# Altium PCB Layout_Dendro.PcbDoc (part 2 of 2)
Units mm, origin at the board's own origin, x right, y up, seen from the top; angles counter-clockwise.
Board outline 80 x 80 mm, 4 copper layers (L1 - TOP (Sig), L2 (GND), L3 (GND), L4 - BOT (Sig)), stack 0.603 mm thick; 132 components, 78 nets, 366 pads, 100 vias.
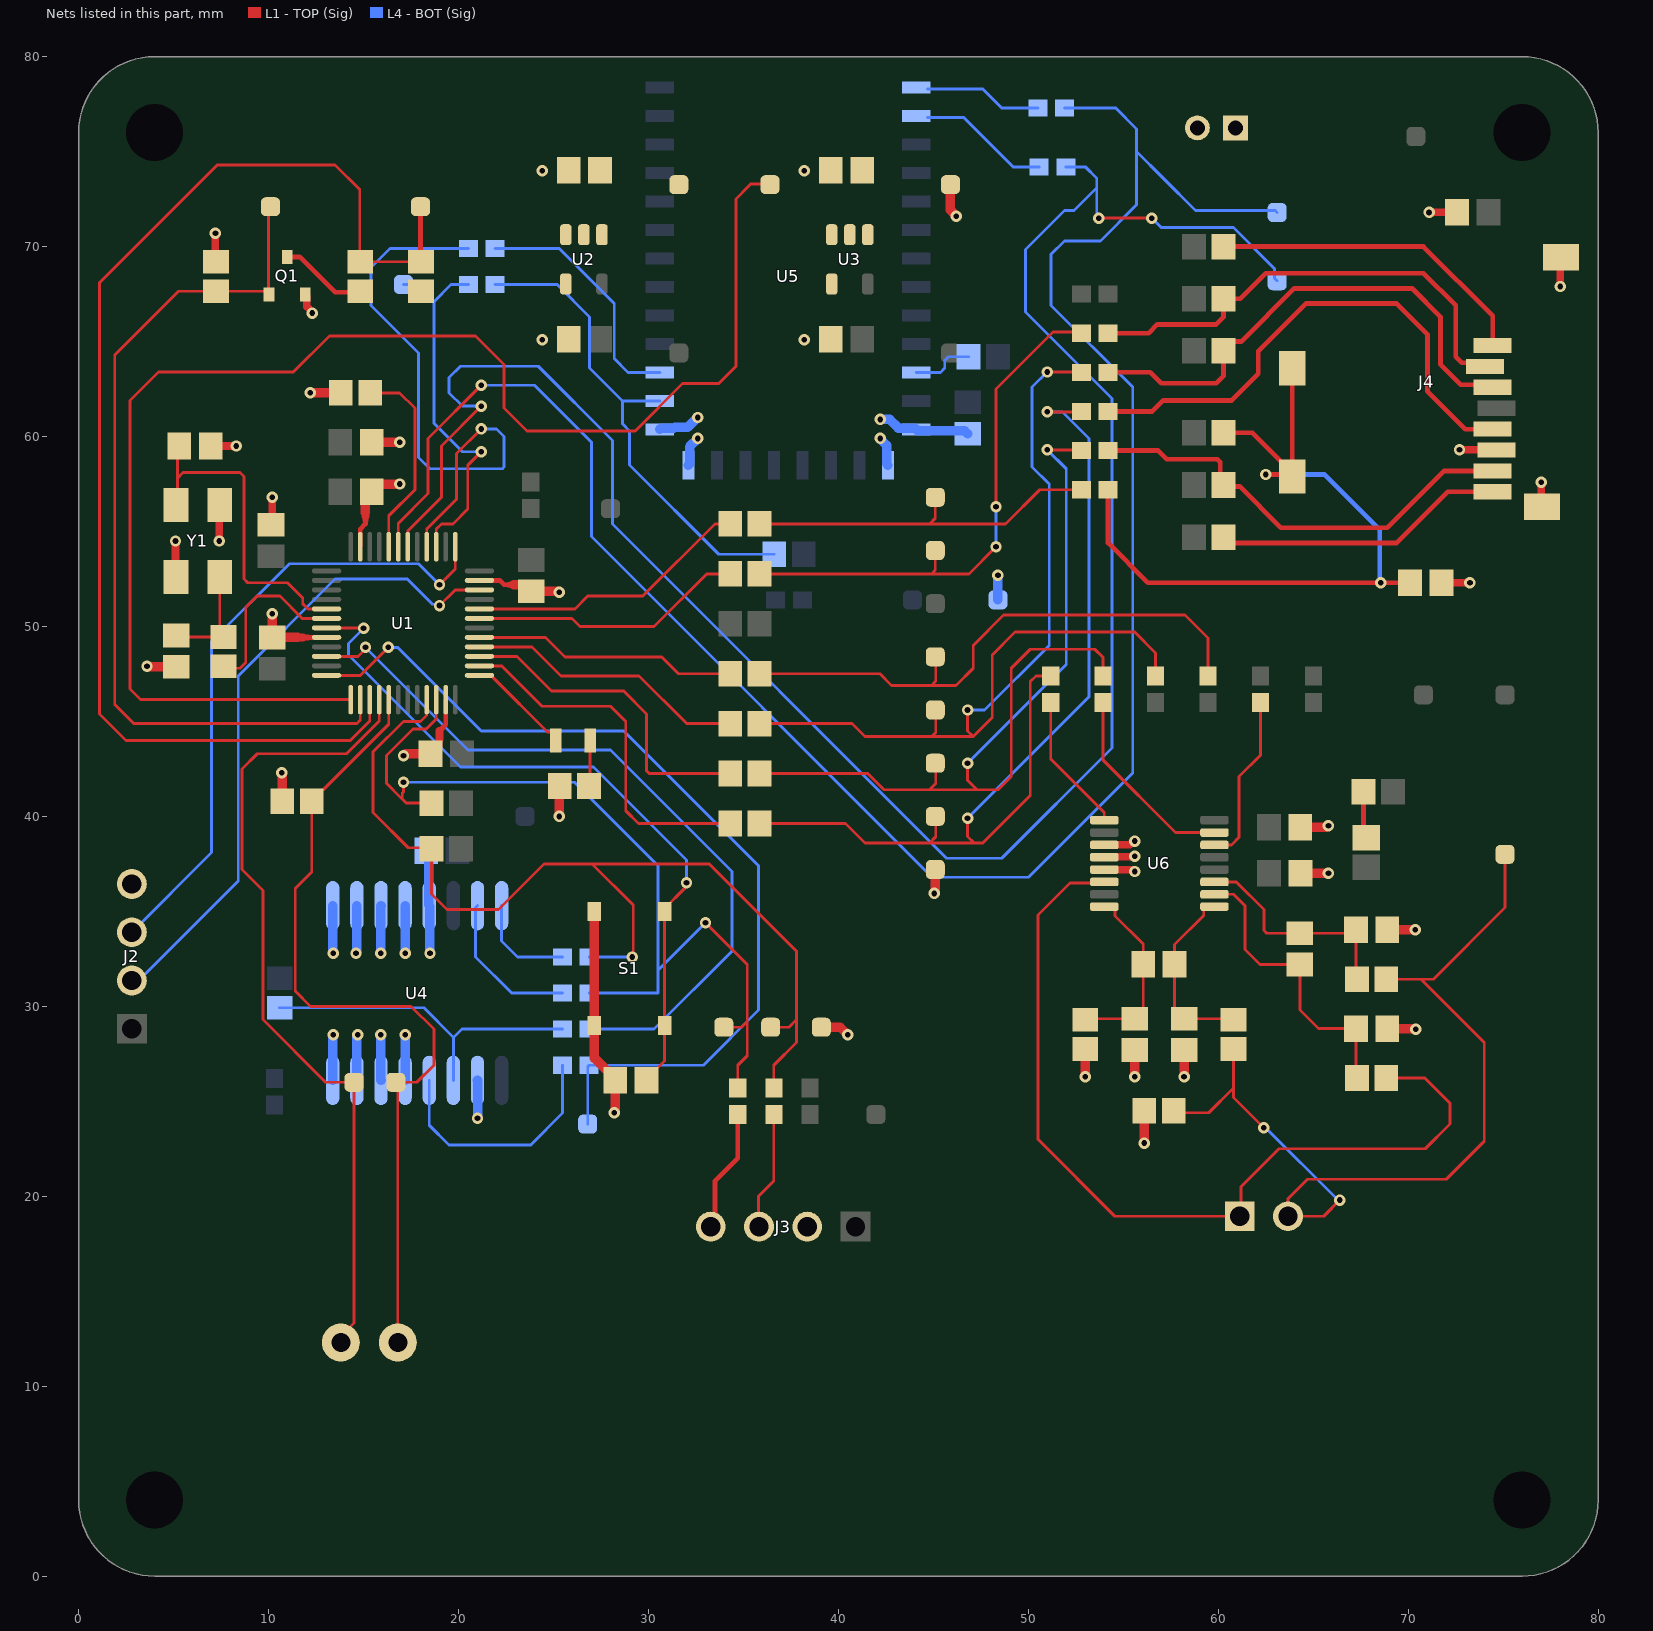
[diagram p4: the nets of this part, all layers, seen from the top]

## Via types
v1: diameter 0.6, hole 0.3, L1 - TOP (Sig) to L4 - BOT (Sig), tented top, 100 vias

## Nets (pads, with @x,y where several pads share a name; then routed paths per layer and width w, separated by ;. In a path a pad name is that pad's centre, name@x,y a point inside that pad or via, vN(x,y) a via of type N, cw(c..) or ccw(c..) an arc to the next point about the centre after c; other vN are vias at no path point) (continued)
ADS_DOUT: JP21.2 U6.15 | length 10.5
  L1 - TOP (Sig) w0.15: JP21.2@53.94,46 53.94,42.96 57.75,39.15 U6.15@59.8,39.15
ADS_DRDY: JP23.1 U6.14 | length 9
  L1 - TOP (Sig) w0.15: U6.14@59.8,38.5 60.7,38.5 61.1,38.9 61.1,42.1 62.22,43.22 JP23.1@62.22,46
ADS_SCLK: JP24.2 U6.1 | length 7.4
  L1 - TOP (Sig) w0.15: JP24.2@51.18,46 51.18,43.02 54,40.2 U6.1@54,39.8
AIN_N: C21.2 C25.1 R31.2 U6.11 | length 11.9
  L1 - TOP (Sig) w0.15: U6.11@59.8,36.55 60.95,36.55 62.4,35.1 62.4,34 62.55,33.85 C21.2@64.3,33.85 67.075,33.85 C25.1@67.25,34.025 67.25,31.475 R31.2@67.3,31.425
AIN_P: C21.1 C24.1 R27.2 U6.10 | length 15.8
  L1 - TOP (Sig) w0.15: U6.10@59.8,35.9 60.8,35.9 61.4,35.3 61.4,33 62.2,32.2 C21.1@64.3,32.2 64.3,29.8 65.275,28.825 C24.1@67.25,28.825 67.25,26.275 R27.2@67.3,26.225
BAT_MEAS: R1.2 R2.1 TP4.1 U1.15 | length 65.8
  L1 - TOP (Sig) w0.15: U1.15@15.327,46.15 U1.15@15.327,46.15 15.326,45.026 14.3,44 2.5,44 1.1,45.4 1.1,68.1 7.3,74.3 13.5,74.3 14.8,73 14.8,69.227 R2.1@14.827,69.2 R1.2@18.027,69.2
  L1 - TOP (Sig) w0.25: TP4.1@18,72.1 18,69.227 R1.2@18.027,69.2
BLE_EN: JP12.2 TP17.1 U1.39 | length 20
  L1 - TOP (Sig) w0.15: U1.39@18.827,54.2 18.827,55.127 19.1,55.4 19.7,55.4 20.488,56.188 20.488,58.488 v1(21.2,59.2)
  L4 - BOT (Sig) w0.15: TP17.1@17.1,68 17.8,68 18.7,67.1 ; JP12.2@20.525,68 19.6,68 18.7,67.1 ; v1(21.2,59.2) 20.2,59.2 18.7,60.7 18.7,67.1
BLE_STATE: JP14.2 U1.40 | length 31.7
  L1 - TOP (Sig) w0.15: U1.40@18.327,54.2 18.327,55.127 19.9,56.7 19.9,59.1 v1(21.2,60.4)
  L4 - BOT (Sig) w0.15: JP14.2@20.525,69.9 16.4,69.9 15.4,68.9 15.4,66.9 17.9,64.4 17.9,58.9 18.5,58.3 22.312,58.3 22.4,58.388 22.4,60 22,60.4 v1(21.2,60.4)
CARD_DET: JP16.2 R18.2 TP27.1 | length 19.2
  L1 - TOP (Sig) w0.15: R18.2@35.85,55.4 44.8,55.4 ; TP27.1@45.1,56.8 45.1,55.7 44.8,55.4 ; JP16.2@52.8,57.2 50.6,57.2 48.8,55.4 44.8,55.4
CARD_DET_MCU: R18.1 U1.32 | length 15.7
  L1 - TOP (Sig) w0.15: U1.32@21.102,50.925 26.125,50.925 26.8,51.6 29.7,51.6 33.5,55.4 R18.1@34.3,55.4 R18.1@33.838,54.938
DEBUG_LED_A: D1.1 U1.25 | length 5.6
  L1 - TOP (Sig) w0.15: U1.25@21.102,47.425 21.725,47.425 21.802,47.348 21.802,47.325 24.69,44.437 24.902,44.437 25.127,44.212 D1.1@25.127,44
DEBUG_LED_K: D1.2 R32.1 | length 2.4
  L1 - TOP (Sig) w0.15: R32.1@26.875,41.6 26.927,41.652 D1.2@26.927,44
DL_LIM: C13.1 R4.1 Y1.3 | length 5.8
  L1 - TOP (Sig) w0.15: C13.1@5.127,49.525 5.202,49.45 R4.1@7.627,49.45 7.427,49.65 Y1.3@7.427,52.6
DS_INT: JP6.1 R8.2 U4.3 | length 18
  L4 - BOT (Sig) w0.15: R8.2@10.578,29.925 18.175,29.925 19.738,28.362 ; U4.3@19.728,26.1 19.728,27.828 19.738,27.838 19.738,28.362 ; JP6.1@25.478,28.8 20.176,28.8 19.738,28.362
DS_RST: JP9.1 U4.4 | length 13
  L4 - BOT (Sig) w0.15: U4.4@18.458,26.1 18.458,23.742 19.5,22.7 23.8,22.7 25.478,24.378 JP9.1@25.478,26.9
DS_SCL: JP5.2 U4.16 | length 5.4
  L4 - BOT (Sig) w0.15: U4.16@22.268,35.3 22.268,33.432 23.1,32.6 JP5.2@25.478,32.6
DS_SDA: JP8.2 U4.15 | length 8.1
  L4 - BOT (Sig) w0.15: U4.15@20.998,35.3 20.9,35.202 20.9,32.6 22.8,30.7 JP8.2@25.478,30.7
EN_ADC_REG: TP7.1 U1.13 U3.3 | length 76.1
  L1 - TOP (Sig) w0.15: U1.13@14.327,46.15 3.25,46.15 2.7,46.7 2.7,61.9 4.2,63.4 11.3,63.4 13.2,65.3 20.9,65.3 22.4,63.8 22.4,61.5 23.6,60.3 29.3,60.3 31.8,62.8 33.7,62.8 34.6,63.7 34.6,72.5 35.3,73.2 35.3,73.212 35.388,73.3 36.36,73.3 TP7.1@36.4,73.26
EN_BAT_MEAS: Q1.1 R3.1 TP5.1 U1.14 | length 47.1
  L1 - TOP (Sig) w0.15: Q1.1@10.022,67.475 Q1.1@10,67.497 ; TP5.1@10.1,72.1 10,72 Q1.1@10,67.497 ; U1.14@14.827,46.15 14.827,45.076 14.651,44.9 2.9,44.9 1.9,45.9 1.9,64.3 5.25,67.65 R3.1@7.227,67.65 9.847,67.65 Q1.1@10,67.497
EN_LIGHT_MEAS: R11.1 TP20.1 U1.16 | length 43.2
  L1 - TOP (Sig) w0.15: R11.1@13.8,12.3 13.8,12.632 14.5,13.332 TP20.1@14.5,26 13,26 9.7,29.3 9.7,36.1 8.6,37.2 8.6,42.5 9.4,43.3 14.1,43.3 15.827,45.027 U1.16@15.827,46.15
FB_AVDD: FB1.1 R26.2 | length 2.5
  L1 - TOP (Sig) w0.25: R26.2@67.65,41.3 67.65,39.025 FB1.1@67.798,38.877
GND: C1.2 C2.2 C3.2 C4.2 C5.2 C6.2 C7.2 C8.2 C9.2 C10.2 C11.2 C12.2 C13.2 C14.2 C15.2 C16.2 C17.2 C18.2 C19.2 C22.2 C23.2 C24.2 C25.2 J1.2 J2.4 J3.2 J4.6 J4.11 J4.12 Q1.2 R3.2 R5.2 R12.2 R29.2 R30.2 R32.2 S1.3 S1.4 TP3.1 TP12.1 TP19.1 TP29.1 U1.8 U1.23 U1.35 U1.47 U2.2 U2.4 U3.2 U3.4 U4.2 U4.5 U4.6 U4.7 U4.8 U4.9 U4.10 U4.11 U4.12 U4.13 U5.13 U5.14 U5.21 U5.22 U6.3 U6.4 U6.5 Y1.2 Y1.4 | length 114.3
  L1 - TOP (Sig) w0.25: 12.069,49.422 12.072,49.425 U1.8@13.052,49.425 ; U1.47@14.827,54.2 14.827,55.127 15.1,55.4 15.1,55.6 ; 19.2,44.7 19.327,44.827 U1.23@19.327,46.15 ; U1.35@21.102,52.425 22.175,52.425 22.4,52.2 22.6,52.2
  L1 - TOP (Sig) w0.3: 11.812,49.419 11.815,49.422 12.069,49.422 ; 15.1,55.6 15.1,55.8 ; 19,44.5 19.2,44.7 ; 22.6,52.2 22.8,52.2
  L1 - TOP (Sig) w0.4: v1(5.1,54.5) 5.1,52.627 Y1.2@5.127,52.6 ; C12.2@6.952,59.5 v1(8.3,59.5) ; v1(7.2,70.7) 7.2,69.227 R3.2@7.227,69.2 ; v1(7.4,54.5) 7.4,56.373 Y1.4@7.427,56.4 ; C8.2@10.127,55.35 10.2,55.423 v1(10.2,56.8) ; 11.535,49.421 11.537,49.419 11.812,49.419 ; Q1.2@11.927,67.475 12.006,67.396 12.006,66.848 12.3,66.554 v1(12.3,66.5) ; 15.1,55.8 15.1,56 ; C11.2@18.8,43.573 18.952,43.725 18.952,43.986 19,44.034 19,44.5 ; 22.8,52.2 22.9,52.2 ; U6.5@54,37.2 55.446,37.2 55.546,37.1 v1(55.6,37.1) ; U6.4@54,37.85 54.025,37.875 55.575,37.875 v1(55.6,37.9) ; U6.3@54,38.5 55.346,38.5 55.546,38.7 v1(55.6,38.7) ; v1(71.1,71.8) C16.2@72.575,71.8 ; C17.2@71.75,52.3 v1(73.25,52.3) ; v1(72.7,59.3) 72.705,59.295 74.645,59.295 J4.6@74.65,59.29 ; v1(77,57.6) 77,56.35 J4.11@77.05,56.3 ; v1(78,67.9) 78,69.4 J4.12@78.05,69.45
  L1 - TOP (Sig) w0.5: v1(3.6,47.9) 3.612,47.888 5.115,47.888 C13.2@5.127,47.875 ; v1(10.2,50.675) C6.2@10.2,49.425 10.204,49.421 11.535,49.421 ; v1(10.7,42.3) 10.713,42.287 10.713,40.812 R12.2@10.725,40.8 ; v1(12.2,62.3) R5.2@13.8,62.3 ; 15.1,56 15.1,56.775 C9.2@15.425,57.1 15.425,57.106 15.8,57.481 16.881,57.481 v1(16.9,57.5) ; C7.2@15.425,59.7 v1(16.9,59.7) ; v1(17.1,43.2) 17.127,43.2 17.227,43.3 C11.2@18.527,43.3 C11.2@18.8,43.573 ; 22.9,52.2 23.477,52.2 C10.2@23.827,51.85 25.223,51.85 25.273,51.8 v1(25.3,51.8) ; v1(25.3,40) 25.313,40.013 25.313,41.588 R32.2@25.325,41.6 ; S1.3@27.15,35 S1.4@27.15,29 27.15,27.275 28.25,26.175 28.25,24.477 28.2,24.427 v1(28.2,24.4) ; TP12.1@39.1,28.9 40.1,28.9 v1(40.5,28.5) ; C4.2@39.7,65.202 C4.2@39.775,65.127 ; v1(45.044,35.944) 45.044,35.971 45.1,36.027 TP29.1@45.1,37.2 ; TP3.1@45.9,73.26 45.9,71.927 46.2,71.627 v1(46.2,71.6) ; v1(53,26.3) R30.2@53,27.75 ; v1(55.6,26.3) C22.2@55.6,27.7 ; v1(56.1,22.8) R29.2@56.1,24.5 ; v1(58.2,26.3) C23.2@58.2,27.7 ; C18.2@64.323,39.425 65.698,39.425 65.773,39.5 v1(65.8,39.5) ; C19.2@64.325,37.001 v1@65.8,37 ; C24.2@68.9,28.825 68.912,28.812 70.388,28.812 v1(70.4,28.8) ; C25.2@68.9,34.025 68.903,34.028 70.369,34.028 v1(70.371,34.031)
  L4 - BOT (Sig) w0.5: U4.8@13.378,26.1 13.389,26.111 13.389,28.489 v1(13.4,28.5) ; U4.9@13.378,35.3 13.389,35.289 13.389,32.811 v1(13.4,32.8) ; v1(14.6,32.8) 14.6,32.827 14.648,32.875 U4.10@14.648,35.3 ; U4.7@14.648,26.1 14.648,28.421 14.7,28.473 v1(14.7,28.5) ; v1(15.9,28.5) 15.909,28.491 15.909,26.109 U4.6@15.918,26.1 ; v1(15.9,32.8) 15.909,32.809 15.909,35.291 U4.11@15.918,35.3 ; U4.5@17.188,26.1 17.194,26.106 17.194,28.494 v1(17.2,28.5) ; U4.12@17.188,35.3 17.194,35.294 17.194,32.806 v1(17.2,32.8) ; C14.2@18.3,38.2 18.42,38.08 18.42,35.338 U4.13@18.458,35.3 18.481,35.277 18.481,32.819 v1(18.5,32.8) ; v1@20.999,24.101 U4.2@20.999,26.099 ; U5.22@30.6,60.375 30.668,60.443 31.335,60.443 31.393,60.5 32.073,60.5 32.573,61 v1(32.6,61) ; U5.21@32.1,58.5 32.167,58.568 32.167,59.468 v1(32.6,59.9) ; v1(42.2,59.9) 42.2,59.873 42.533,59.54 42.533,58.568 U5.14@42.6,58.5 ; v1@42.227,60.9 42.7,60.9 43.158,60.443 44.033,60.443 44.168,60.307 46.643,60.307 C15.2@46.8,60.15 ; TP19.1@48.4,51.4 v1(48.4,52.7)
  other v1: 21,24.1 65.8,37 42.2,60.9 24.4,65.1 38.2,65.1 24.4,74 38.2,74
HM10_EN: JP12.1 R10.2 U5.23 | length 25.9
  L4 - BOT (Sig) w0.15: JP12.1@21.925,68 25.2,68 26.9,66.3 26.9,63.6 28.625,61.875 ; U5.23@30.6,61.875 28.625,61.875 ; R10.2@36.625,53.8 33.7,53.8 29,58.5 29,60.3 28.625,60.675 28.625,61.875
HM10_RST: R9.2 U5.11 | length 3.3
  L4 - BOT (Sig) w0.15: U5.11@44.1,63.375 45.375,63.375 45.6,63.6 45.6,64 45.8,64.2 R9.2@46.85,64.2
HM10_RX: JP13.2 U5.2 | length 6.9
  L4 - BOT (Sig) w0.15: U5.2@44.7,76.8 46.6,76.8 49.2,74.2 JP13.2@50.573,74.2
HM10_STATE: JP14.1 U5.24 | length 13.1
  L4 - BOT (Sig) w0.15: JP14.1@21.925,69.9 25.3,69.9 28.2,67 28.2,64.1 28.925,63.375 U5.24@30.6,63.375
HM10_TX: JP11.2 U5.1 | length 6.2
  L4 - BOT (Sig) w0.15: U5.1@44.7,78.3 47.6,78.3 48.6,77.3 JP11.2@50.5,77.3
I2C_SCL: JP3.1 JP5.1 R6.2 TP10.1 U1.21 | length 53.8
  L1 - TOP (Sig) w0.15: U1.21@18.327,46.15 18.316,46.139 18.316,45.316 18,45 17.1,45 15.5,43.4 15.5,40.2 17.35,38.35 18.527,38.35 R6.2@18.577,38.3 18.577,35.923 19.4,35.1 22.1,35.1 24.5,37.5 27.029,37.5 ; v1(29.138,32.595) 29.2,32.657 29.2,35.329 27.029,37.5 ; TP10.1@36.5,28.967 TP10.1@36.433,28.9 37.4,28.9 37.8,29.3 ; JP3.1@36.6,25.7 36.6,26.9 37.8,28.1 37.8,29.3 ; 27.029,37.5 33.2,37.5 37.8,32.9 37.8,29.3
  L4 - BOT (Sig) w0.15: JP5.1@26.878,32.6 26.883,32.595 v1(29.138,32.595)
I2C_SDA: JP4.1 JP8.1 R7.2 TP11.1 U1.22 | length 50
  L1 - TOP (Sig) w0.15: 17.034,40.937 17.034,41.215 17.1,41.281 v1(17.1,41.8) ; R7.2@18.725,40.7 17.248,40.7 17.023,40.925 16.948,41 16.2,41.748 16.2,43.2 17.6,44.6 18.3,44.6 18.827,45.127 U1.22@18.827,46.15 ; v1(33,34.4) 35.2,32.2 35.2,29.2 ; TP11.1@33.967,28.9 34.9,28.9 35.2,29.2 ; JP4.1@34.7,25.7 34.7,26.9 35.2,27.4 35.2,29.2
  L4 - BOT (Sig) w0.15: v1(17.1,41.8) 26.1,41.8 30.5,37.4 30.5,31.9 ; JP8.1@26.878,30.7 30.5,30.7 30.5,31.9 ; v1(33,34.4) 30.5,31.9
LIGHT_MEAS: R11.2 R12.1 TP21.1 U1.17 | length 43.6
  L1 - TOP (Sig) w0.15: U1.17@16.327,46.15 16.327,44.852 12.875,41.4 12.825,41.4 12.275,40.85 12.275,37.075 11.4,36.2 11.4,30.8 12.2,30 17.5,30 18.7,28.8 18.7,26.9 17.8,26 TP21.1@16.7,26 16.8,25.9 R11.2@16.8,12.3
MCU_BOOT: R5.1 U1.44 | length 10.6
  L1 - TOP (Sig) w0.15: R5.1@15.35,62.3 16.9,62.3 17.7,61.5 17.7,57.2 16.327,55.827 U1.44@16.327,54.2
MCU_OSC_IN: C12.1 U1.5 Y1.1 | length 17.5
  L1 - TOP (Sig) w0.15: Y1.1@5.127,56.4 5.2,56.473 5.2,57.8 ; C12.1@5.302,59.5 5.2,59.398 5.2,57.8 ; U1.5@13.052,50.925 12.075,50.925 12,51 11.8,51.2 11.8,51.5 11,52.3 8.9,52.3 8.7,52.5 8.7,57.9 8.5,58.1 5.5,58.1 5.2,57.8
MCU_OSC_OUT: R4.2 U1.6 | length 9.2
  L1 - TOP (Sig) w0.15: R4.2@7.627,47.9 7.727,47.8 8.5,47.8 8.8,48.1 8.8,51 9.4,51.6 10.6,51.6 11.775,50.425 U1.6@13.052,50.425
MCU_RESET: C5.1 S1.1 S1.2 U1.7 | length 38.4
  L1 - TOP (Sig) w0.15: U1.7@13.052,49.925 13.065,49.912 14.988,49.912 v1(15,49.9) ; C5.1@29.9,26.1 29.9,26.175 30.85,27.125 S1.2@30.85,29 S1.1@30.85,35 30.85,35.15 31.914,36.214 31.914,36.414 v1(32,36.5)
  L4 - BOT (Sig) w0.15: v1(15,49.9) 14.2,49.1 14.2,48.5 20.1,42.6 27.1,42.6 32,37.7 v1(32,36.5)
REF_N: C20.2 C22.1 R30.1 U6.8 | length 9.8
  L1 - TOP (Sig) w0.15: R30.1@53,29.3 53.05,29.35 C22.1@55.6,29.35 56.05,29.8 C20.2@56.05,32.225 56.05,33.277 54.563,34.765 54.563,35.103 54.415,35.25 U6.8@54,35.25
REF_P: C20.1 C23.1 R28.1 U6.9 | length 9.8
  L1 - TOP (Sig) w0.15: U6.9@59.8,35.25 59.385,35.25 59.237,35.103 59.237,34.79 57.7,33.252 C20.1@57.7,32.225 57.7,29.85 C23.1@58.2,29.35 60.75,29.35 R28.1@60.8,29.3
RTC_INT: JP6.2 U1.10 | length 39.9
  L1 - TOP (Sig) w0.15: U1.10@13.052,48.425 14.703,48.425 15.1,48.822 v1(15.1,48.9)
  L4 - BOT (Sig) w0.15: v1(15.1,48.9) 20.5,43.5 28,43.5 34.4,37.1 34.4,32.9 30.3,28.8 JP6.2@26.878,28.8
RTC_RST: JP9.2 TP14.1 U1.12 | length 49
  L1 - TOP (Sig) w0.15: U1.12@13.052,47.425 14.825,47.425 v1(16.3,48.9)
  L4 - BOT (Sig) w0.15: v1(16.3,48.9) 16.8,48.9 19.3,46.4 21.2,44.5 28.7,44.5 35.8,37.4 35.8,29.8 32.9,26.9 JP9.2@26.878,26.9 26.8,26.822 TP14.1@26.8,23.8
RX_MCU: JP11.1 TP16.1 U1.43 | length 112.2
  L1 - TOP (Sig) w0.15: U1.43@16.827,54.2 16.827,55.427 18.4,57 18.4,59.9 v1(21.2,62.7)
  L4 - BOT (Sig) w0.15: v1(21.2,62.7) 24,62.7 27,59.7 27,54.73 44.93,36.8 50.012,36.8 55.5,42.288 55.5,62.6 51.2,66.9 51.2,69.6 51.9,70.3 53.8,70.3 55.7,72.2 55.7,75 ; JP11.1@51.9,77.3 54.6,77.3 55.7,76.2 55.7,75 ; TP16.1@63.1,71.8 63,71.9 58.8,71.9 57.1,73.6 55.7,75
SD_CD: C17.1 J4.9 J4.10 JP16.1 R25.2 | length 41
  L1 - TOP (Sig) w0.25: JP16.1@54.2,57.2 54.2,54.4 56.3,52.3 v1(68.55,52.3) C17.1@70.1,52.3 ; R25.2@60.25,60.2 61.8,60.2 J4.9@63.9,58.1 ; v1(62.5,58) 63.8,58 J4.9@63.9,58.1 ; J4.10@63.9,63.6 J4.9@63.9,58.1
  L4 - BOT (Sig) w0.25: v1(62.5,58) 65.6,58 68.5,55.1 v1@68.5,52.3
SD_CLK: J4.5 JP19.2 | length 27.8
  L1 - TOP (Sig) w0.25: JP19.2@54.2,61.32 56.52,61.32 57.1,61.9 60.7,61.9 62.1,63.3 62.1,64.5 64.6,67 69.4,67 71.01,65.39 71.01,62.39 73.01,60.39 J4.5@74.45,60.39
SD_CMD: J4.3 JP18.2 R21.2 | length 27
  L1 - TOP (Sig) w0.25: JP18.2@54.2,63.38 56.42,63.38 57,62.8 59.9,62.8 60.275,63.175 R21.2@60.275,64.52 ; R21.2@60.25,64.57 60.68,65 61.2,65 64,67.8 70.2,67.8 71.7,66.3 71.7,63.8 72.77,62.73 74.31,62.73 J4.3@74.45,62.59
SD_DAT0: J4.7 JP17.2 R22.2 | length 23.7
  L1 - TOP (Sig) w0.25: JP17.2@54.2,59.26 56.84,59.26 57.3,58.8 59.954,58.8 60.1,58.654 60.1,57.81 60.25,57.66 60.539,57.371 61.129,57.371 63.3,55.2 68.9,55.2 71.89,58.19 J4.7@74.45,58.19
SD_DAT1: J4.8 R24.2 | length 15.4
  L1 - TOP (Sig) w0.25: R24.2@60.275,54.7 60.575,54.4 69.4,54.4 72.09,57.09 J4.8@74.45,57.09
SD_DAT2: J4.1 R23.2 | length 17.2
  L1 - TOP (Sig) w0.25: R23.2@60.275,70 70.8,70 74.45,66.35 J4.1@74.45,64.79
SD_DAT3: J4.2 JP20.2 R20.2 | length 25.4
  L1 - TOP (Sig) w0.25: JP20.2@54.2,65.44 56.34,65.44 56.8,65.9 59.9,65.9 60.275,66.275 R20.2@60.275,67.26 61.16,67.26 62.5,68.6 70.8,68.6 72.5,66.9 72.5,64.2 72.821,63.879 73.861,63.879 J4.2@74.05,63.69
SHT_SCL: J3.3 JP3.2 | length 6.2
  L1 - TOP (Sig) w0.15: J3.3@35.82,18.4 35.8,18.42 35.8,20 36.6,20.8 JP3.2@36.6,24.3
SHT_SDA: J3.4 JP4.2 | length 6.5
  L1 - TOP (Sig) w0.25: J3.4@33.28,18.4 33.5,18.62 33.5,20.8 34.7,22 JP4.2@34.7,24.3
SPI_CLK: JP19.1 JP24.1 R15.2 TP24.1 | length 53.1
  L1 - TOP (Sig) w0.15: R15.2@35.85,39.627 40.373,39.627 41.4,38.6 44.8,38.6 ; TP24.1@45.125,40 45.125,38.925 44.8,38.6 ; v1(46.8,39.9) 46.8,38.95 47.15,38.6 ; v1(51,61.3) 52.78,61.3 JP19.1@52.8,61.32 ; JP24.1@51.18,47.4 50.4,47.4 50.1,47.1 50.1,41.1 47.6,38.6 47.15,38.6 ; 44.8,38.6 47.15,38.6
  L4 - BOT (Sig) w0.15: v1(46.8,39.9) 53.2,46.3 53.2,59.9 51.8,61.3 v1(51,61.3)
SPI_CLK_MCU: R15.1 U1.26 | length 19.4
  L1 - TOP (Sig) w0.15: U1.26@21.102,47.925 22.275,47.925 24.4,45.8 28,45.8 28.8,45 28.8,40.3 29.473,39.627 R15.1@34.3,39.627
SPI_CS_ADC: JP25.1 R17.2 TP26.1 | length 30.2
  L1 - TOP (Sig) w0.15: R17.2@35.85,47.514 42.186,47.514 42.8,46.9 44.9,46.9 ; TP26.1@45.125,48.4 45.125,47.125 44.9,46.9 ; JP25.1@59.46,47.4 59.46,49.393 58.253,50.6 48.7,50.6 47.1,49 47.1,47.8 46.2,46.9 44.9,46.9
SPI_CS_ADC_MCU: R17.1 U1.29 | length 14
  L1 - TOP (Sig) w0.15: U1.29@21.102,49.425 24.575,49.425 25.6,48.4 30.7,48.4 31.586,47.514 R17.1@34.3,47.514
SPI_CS_SD: JP20.1 R16.2 TP25.1 | length 28.4
  L1 - TOP (Sig) w0.15: R16.2@35.85,52.771 44.9,52.771 ; TP25.1@45.1,54 45.1,52.971 44.9,52.771 ; v1(48.3,54.2) 46.871,52.771 44.9,52.771 ; v1(48.3,56.3) 48.3,62.5 51.3,65.5 52.74,65.5 JP20.1@52.8,65.44
  L4 - BOT (Sig) w0.15: v1(48.3,54.2) v1(48.3,56.3)
SPI_CS_SD_MCU: R16.1 U1.31 | length 14.5
  L1 - TOP (Sig) w0.15: U1.31@21.102,50.425 25.975,50.425 26.4,50 30.3,50 33.071,52.771 R16.1@34.3,52.771
SPI_MISO: JP17.1 JP21.1 R13.2 TP22.1 | length 50
  L1 - TOP (Sig) w0.15: R13.2@35.85,42.256 41.544,42.256 42.4,41.4 44.8,41.4 ; TP22.1@45.125,42.8 45.125,41.725 44.8,41.4 ; v1(46.8,42.8) 46.8,41.9 47.3,41.4 ; v1(51,59.3) 52.76,59.3 JP17.1@52.8,59.26 ; JP21.1@53.94,47.4 53.94,48.36 53.5,48.8 50.1,48.8 49.1,47.8 49.1,42.1 48.4,41.4 47.3,41.4 ; 44.8,41.4 47.3,41.4
  L4 - BOT (Sig) w0.15: v1(46.8,42.8) 52,48 52,58.3 v1(51,59.3)
SPI_MISO_MCU: R13.1 U1.27 | length 17.5
  L1 - TOP (Sig) w0.15: U1.27@21.102,48.425 23.075,48.425 23.9,47.6 24.9,46.6 28.7,46.6 29.9,45.4 29.9,42.4 30.044,42.256 R13.1@34.3,42.256
SPI_MOSI: JP18.1 JP22.1 R14.2 TP23.1 | length 52.6
  L1 - TOP (Sig) w0.15: R14.2@35.85,44.885 40.715,44.885 41.4,44.2 44.9,44.2 ; TP23.1@45.125,45.6 45.125,44.425 44.9,44.2 ; v1(46.8,45.6) 46.8,44.5 47.1,44.2 ; v1(51,63.4) 52.78,63.4 JP18.1@52.8,63.38 ; JP22.1@56.7,47.4 56.7,48.6 55.6,49.7 49.3,49.7 48.1,48.5 48.1,45.2 47.1,44.2 ; 44.9,44.2 47.1,44.2
  L4 - BOT (Sig) w0.15: v1(46.8,45.6) 47.7,45.6 51.1,49 51.1,57.5 50.2,58.4 50.2,62.6 v1(51,63.4)
SPI_MOSI_MCU: R14.1 U1.28 | length 14.9
  L1 - TOP (Sig) w0.15: U1.28@21.102,48.925 23.875,48.925 25.4,47.4 29.5,47.4 32.015,44.885 R14.1@34.3,44.885
SW_DRAIN: Q1.3 R2.2 | length 4.6
  L1 - TOP (Sig) w0.25: Q1.3@10.974,69.456 11.644,69.456 13.5,67.6 14.777,67.6 R2.2@14.827,67.65
SWCLK: J2.3 U1.37 | length 33.5
  L1 - TOP (Sig) w0.15: v1(19,52.2) 19.827,53.027 U1.37@19.827,54.2
  L4 - BOT (Sig) w0.15: J2.3@2.8,33.9 7,38.1 7,49.2 11.1,53.3 17.9,53.3 v1(19,52.2)
SWDIO: J2.2 U1.34 | length 34.3
  L1 - TOP (Sig) w0.15: v1(19,51.1) 19.825,51.925 U1.34@21.102,51.925
  L4 - BOT (Sig) w0.15: J2.2@2.8,31.36 3.16,31.36 8.4,36.6 8.4,47.4 13.5,52.5 17.3,52.5 18.629,51.171 18.929,51.171 v1(19,51.1)
TX_MCU: JP13.1 TP18.1 U1.42 | length 110.9
  L1 - TOP (Sig) w0.15: U1.42@17.327,54.2 17.336,54.209 17.336,55.036 19.1,56.8 19.1,59.5 v1(21.2,61.6) ; v1(53.7,71.5) v1(56.5,71.5)
  L4 - BOT (Sig) w0.15: v1(21.2,61.6) 20.2,61.6 19.5,62.3 19.5,63.1 20.1,63.7 24.2,63.7 28.1,59.8 28.1,55.4 45.7,37.8 48.6,37.8 54.4,43.6 54.4,62 49.85,66.55 49.85,69.85 51.9,71.9 52.4,71.9 53.585,73.085 ; JP13.1@51.973,74.2 53,74.2 53.594,73.606 ; 53.6,73.591 53.6,73.537 53.6,73.085 53.6,71.813 53.614,71.799 53.614,71.586 v1(53.7,71.5) ; v1(56.5,71.5) 57,71 60.8,71 62.963,68.837 62.963,68.337 TP18.1@63.1,68.2
VIN: C1.1 C3.1 J1.1 R1.1 TP1.1 U2.1 U2.3 U3.1
VSENSE_N: J5.2 R28.2 R29.1 R31.1 TP33.1 | length 50.2
  L1 - TOP (Sig) w0.15: R29.1@57.65,24.5 57.75,24.4 59.5,24.4 60.8,25.7 ; R28.2@60.8,27.75 60.8,25.7 ; v1(62.4,23.6) 60.8,25.2 60.8,25.7 ; v1(66.4,19.8) 65.55,18.95 J5.2@63.67,18.95 63.672,18.952 63.672,19.872 64.7,20.9 72,20.9 74,22.9 74,28.1 70.7,31.4 70.675,31.425 ; R31.1@68.85,31.425 70.675,31.425 ; TP33.1@75.1,38 75.1,35.2 71.325,31.425 70.675,31.425
  L4 - BOT (Sig) w0.15: v1(62.4,23.6) 62.5,23.6 66.3,19.8 v1(66.4,19.8)
VSENSE_P: J5.1 R27.1 U6.6 | length 47.3
  L1 - TOP (Sig) w0.15: U6.6@54,36.55 53.95,36.5 52.2,36.5 50.5,34.8 50.5,23 54.55,18.95 J5.1@61.13,18.95 61.2,19.02 61.2,20.5 63.2,22.5 70.9,22.5 72.2,23.8 72.2,24.9 70.875,26.225 R27.1@68.85,26.225
pads on no net: U1.2 U1.3 U1.4 U1.11 U1.18 U1.19 U1.20 U1.33 U1.38 U1.41 U1.45 U1.46 U4.1 U5.3 U5.4 U5.5 U5.6 U5.7 U5.8 U5.9 U5.10 U5.15 U5.16 U5.17 U5.18 U5.19 U5.20 U5.25 U5.26 U5.27 U5.28 U5.29 U5.30 U5.31 U5.32 U5.33 U5.34 U6.7

## Polygon pours and split planes (outlines as drawn)
EN_ADC_REG on L1 - TOP (Sig) "NONET_L01_P-001" (solid, pour order 9): 36.1,72.5 36.1,73.6 36.7,73.6 36.7,72.5 40,72.5 40.3,72.2 40.3,70 39.2,70 39.2,71 38.7,71.5 36.1,71.5 35.8,71.8 35.8,72.5
VIN on L1 - TOP (Sig) "NONET_L01_P-001" (solid, pour order 8): 42.3,69.9 42.3,76.1 43.9,77.7 59.3,77.7 60,77 60,75.1 60.4,74.7 61.8,74.7 62.3,75.2 62.3,78.4 61.4,79.3 40.9,79.3 40.3,78.7 40.3,73.1 40.9,72.5 40.9,71.3 40.9,69.9
VIN on L1 - TOP (Sig) "NONET_L01_P-001" (solid, pour order 13): 22.6,79.3 21.1,77.8 21.1,72.7 21.9,71.9 25,71.9 25.14,71.76 25.14,69.833 26.273,69.833 26.308,69.798 26.308,72.098 25.708,72.698 24.308,72.698 23.708,73.298 23.708,76.098 24.308,76.698 25.808,76.698 26.508,75.998 26.508,72.798 26.908,72.398 26.908,71.408 26.9,71.4 27.084,71.216 27.097,69.798 28.2,69.798 28.2,72 29.2,73 31.8,73 31.8,73.5 30.3,73.5 29.9,73.9 29.9,77.4 29,78.3 29,79.3
+3V_MCU on L1 - TOP (Sig) "NONET_L01_P-001" (solid, pour order 2): 22.9,37.2 22.4,36.7 19.9,36.7 19.7,36.9 19.7,46.9 21.238,46.9 22.9,45.179
+3V_MCU on L1 - TOP (Sig) "NONET_L01_P-001" (solid, pour order 0): 9.4,60.6 9.9,61.1 14.4,61.1 14.4,52.8 9.4,52.8
GND on L1 - TOP (Sig) "NONET_L01_P-001" (solid, pour order 10): 23.708,76.098 24.308,76.698 25.808,76.698 26.508,75.998 26.508,72.798 26.908,72.398 26.908,69.498 26.208,68.798 26.208,67.198 26.508,66.898 26.508,63.598 26.108,63.198 24.408,63.198 23.708,63.898 23.708,66.298 24.308,66.898 24.908,66.898 25.208,67.198 25.208,68.698 26.308,69.798 26.308,72.098 25.708,72.698 24.308,72.698 23.708,73.298
GND on L1 - TOP (Sig) "NONET_L01_P-001" (solid, pour order 4): 37.5,76 38.3,76.8 39.8,76.8 40.3,76.3 40.3,73.1 40.9,72.5 40.9,69.6 40.2,68.9 40.2,67.3 40.3,67.2 40.3,63.5 40.1,63.3 38.1,63.3 37.5,63.9 37.5,66.5 38,67 38.9,67 39.2,67.3 39.2,68.8 40.3,69.9 40.3,72.2 39.7,72.8 38.3,72.8 37.5,73.6
VIN on L1 - TOP (Sig) "NONET_L01_P-001" (solid, pour order 16): 21.1,73.6 21.1,68.8 20.3,68 17.7,68 17.7,67.2 21.4,67.2 22.6,68.4 22.6,71.7 22.8,71.9
VIN on L1 - TOP (Sig) "NONET_L01_P-001" (solid, pour order 15): 30.197,76.497 29.6,75.9 29.6,77.7 29,78.3 29,79.3 41.3,79.3 40.9,78.9 40.9,76.481 40.05,76.55 39.8,76.8 38.3,76.8 37.997,76.497
+3V on L1 - TOP (Sig) "NONET_L01_P-001" (solid, pour order 11): 26.8,63.6 27.1,63.3 29.9,63.3 30.7,64.1 31.9,64.1 31.9,64.6 30.7,64.6 30.4,64.9 30.4,66.2 29.6,67 28.2,67 28.2,68.8 27.1,68.8 27.1,67.2 26.8,66.9
+3VA on L1 - TOP (Sig) "NONET_L01_P-001" (solid, pour order 7): 40.6,63.5 40.8,63.3 43.9,63.3 44.7,64.1 45.9,64.1 45.9,64.6 44.7,64.6 44.4,64.9 44.4,66.2 43.6,67 42.2,67 42.2,68.8 41.1,68.8 41.1,67.5 40.6,67
GND on L2 (GND) (split plane): 76.249,79.483 76.497,79.456 76.742,79.412 76.984,79.35 77.22,79.272 77.45,79.176 77.673,79.065 77.888,78.937 78.092,78.795 78.287,78.639 78.469,78.469 78.639,78.287 78.795,78.092 78.937,77.888 79.065,77.673 79.176,77.45 79.272,77.22 79.35,76.984 79.412,76.742 79.456,76.497 79.483,76.249 79.491,76.016 79.49,76 79.49,4 79.491,3.984 79.483,3.751 79.456,3.503 79.412,3.258 79.35,3.016 79.272,2.78 79.176,2.55 79.065,2.327 78.937,2.112 78.795,1.908 78.639,1.713 78.469,1.531 78.287,1.361 78.092,1.205 77.888,1.063 77.673,0.935 77.45,0.824 77.22,0.728 76.984,0.65 76.742,0.588 76.497,0.544 76.249,0.517 76.016,0.509 76,0.51 4,0.51 3.984,0.509 3.751,0.517 3.503,0.544 3.258,0.588 3.016,0.65 2.78,0.728 2.55,0.824 2.327,0.935 2.112,1.063 1.908,1.205 1.713,1.361 1.531,1.531 1.361,1.713 1.205,1.908 1.063,2.112 0.935,2.327 0.824,2.55 0.728,2.78 0.65,3.016 0.588,3.258 0.544,3.503 0.517,3.751 0.509,3.984 0.51,4 0.51,76 0.509,76.016 0.517,76.249 0.544,76.497 0.588,76.742 0.65,76.984 0.728,77.22 0.824,77.45 0.935,77.673 1.063,77.888 1.205,78.092 1.361,78.287 1.531,78.469 1.713,78.639 1.908,78.795 2.112,78.937 2.327,79.065 2.55,79.176 2.78,79.272 3.016,79.35 3.258,79.412 3.503,79.456 3.751,79.483 3.984,79.491 4,79.49 76,79.49 76.016,79.491
GND on L3 (GND) (split plane): 76.249,79.483 76.497,79.456 76.742,79.412 76.984,79.35 77.22,79.272 77.45,79.176 77.673,79.065 77.888,78.937 78.092,78.795 78.287,78.639 78.469,78.469 78.639,78.287 78.795,78.092 78.937,77.888 79.065,77.673 79.176,77.45 79.272,77.22 79.35,76.984 79.412,76.742 79.456,76.497 79.483,76.249 79.491,76.016 79.49,76 79.49,4 79.491,3.984 79.483,3.751 79.456,3.503 79.412,3.258 79.35,3.016 79.272,2.78 79.176,2.55 79.065,2.327 78.937,2.112 78.795,1.908 78.639,1.713 78.469,1.531 78.287,1.361 78.092,1.205 77.888,1.063 77.673,0.935 77.45,0.824 77.22,0.728 76.984,0.65 76.742,0.588 76.497,0.544 76.249,0.517 76.016,0.509 76,0.51 4,0.51 3.984,0.509 3.751,0.517 3.503,0.544 3.258,0.588 3.016,0.65 2.78,0.728 2.55,0.824 2.327,0.935 2.112,1.063 1.908,1.205 1.713,1.361 1.531,1.531 1.361,1.713 1.205,1.908 1.063,2.112 0.935,2.327 0.824,2.55 0.728,2.78 0.65,3.016 0.588,3.258 0.544,3.503 0.517,3.751 0.509,3.984 0.51,4 0.51,76 0.509,76.016 0.517,76.249 0.544,76.497 0.588,76.742 0.65,76.984 0.728,77.22 0.824,77.45 0.935,77.673 1.063,77.888 1.205,78.092 1.361,78.287 1.531,78.469 1.713,78.639 1.908,78.795 2.112,78.937 2.327,79.065 2.55,79.176 2.78,79.272 3.016,79.35 3.258,79.412 3.503,79.456 3.751,79.483 3.984,79.491 4,79.49 76,79.49 76.016,79.491

## Silkscreen, mask and mechanical layers (free items; w line width, h text height)
Top Overlay:
  lines w0.254: 0,64.1 0.6,64.1 21.5,64.1 22.4,63.2 22.4,60.6 22.6,60.4 28.6,60.4 29.5,60.4 30.9,59 50.5,59 ; 1.027,22.1 80.8,22.1 ; 9.5,22.1 9.5,29 10,29.5 24.4,29.5 25.1,28.8 25.1,22.1 ; 32.4,22.1 32.4,22.6 32.4,35 32.7,35.3 47.6,35.3 47.6,27.1 ; 47.7,22.2 47.6,22.2 47.6,48.4 48,48.8 76.1,48.8 78.8,48.8 79.8,48.8 ; 50.6,48.9 50.6,73 50.9,73.3 65.4,73.3 65.7,73.6 65.7,79.1 65.7,79.8
  text "Power Management" at 25.75,78.183 h1
  text "+3V" at 68.95,76.95 h1
  text "EN" at 9.25,76.85 h1
  text "BAT" at 8.85,75.05 h1
  text "BAT" at 16.85,75.05 h1
  text "VIN" at 30.05,74.45 h1
  text "EN" at 35.35,74.45 h1
  text "GND" at 44.35,74.45 h1
  text "MEAS" at 8.35,73.25 h1
  text "MEAS" at 16.35,73.25 h1
  text "+3V" at 29.45,61.95 h1
  text "+3VA" at 43.45,61.95 h1
  text "+3V" at 26.55,57.35 h1
  text "CDSD" at 40.05,56.25 h1
  text "CSSD" at 40.05,53.45 h1
  text "DRDY" at 40.05,50.55 h1
  text "Datalogging" at 51.55,49.783 h1
  text "+3VA" at 76.35,47.75 h1 r270
  text "CSADC" at 39.15,47.65 h1
  text "+3V" at 71.95,47.65 h1 r270
  text "Debug" at 25.25,45.883 h1
  text "MOSI" at 40.217,44.85 h1
  text "Flex Sensor" at 48.55,44.55 h1 r270
  text "MISO" at 40.133,42.15 h1
  text "Sense" at 76.65,40.35 h1 r270
  text "CLK" at 41.05,39.25 h1
  text "GND" at 41.05,36.55 h1
  text "GND" at 4.95,36.05 h1
  text "Reset" at 24.55,35.15 h1 r270
  text "SHT30" at 45.35,33.85 h1 r270
  text "SWCLK" at 5.05,33.45 h1
  text "SDA" at 33.55,32.95 h1 r270
  text "SCL" at 36.05,32.95 h1 r270
  text "GND" at 38.55,32.95 h1 r270
  text "SWDIO" at 5.05,30.85 h1
  text "+3V" at 4.95,28.15 h1
  text "Light" at 18.05,26.083 h1
  text "EN" at 11.45,25.917 h1
  text "+3V" at 40.25,25.35 h1.27
  text "Light monitor" at 11.55,22.683 h1
Bottom Overlay:
  lines w0.254: 6.6,79.9 6.6,77.5 6.6,50.3 ; 36.3,32.9 59.3,32.9 60.5,34.1 60.5,63 61.5,64 67.5,64 68.5,65 68.5,74.3 67.9,74.9 57.3,74.9 56.9,75.3 56.9,80 ; 6.6,50.3 10,53.7 ; 6.6,50.3 10,53.7 ; 6.6,50.3 6.6,23.9 10.9,19.6 31.4,19.6 36.3,24.5 36.3,43 33.9,45.4 29.3,50 25.6,53.7 10,53.7
  text "BLE" at 21.75,77.15 h1
  text "Connectivity" at 21.75,75.083 h1
  text "RX" at 63.933,72.85 h1
  text "EN" at 17.85,69.35 h1
  text "TX" at 63.933,69.25 h1
  text "Real time clock" at 8.75,49.15 h1 r90
  text "+3V" at 45.233,48.95 h1
  text "GND" at 49.733,48.95 h1
  text "+3V" at 24.95,41.05 h1
  text "RST" at 28.233,21.55 h1
Mechanical 1:
  the board outline again, w0.254